# Altium PCB main.PcbDoc (part 3 of 3)
Units mm, origin at the board's own origin, x right, y up, seen from the top; angles counter-clockwise.
Board outline 74.1 x 99.1 mm, 4 copper layers (Top Layer, Ground Layer, Power Layer, Bottom Layer), stack 1.591 mm thick; 213 components, 167 nets, 923 pads, 289 vias.
Unrouted connection lines stored in the file: 41.
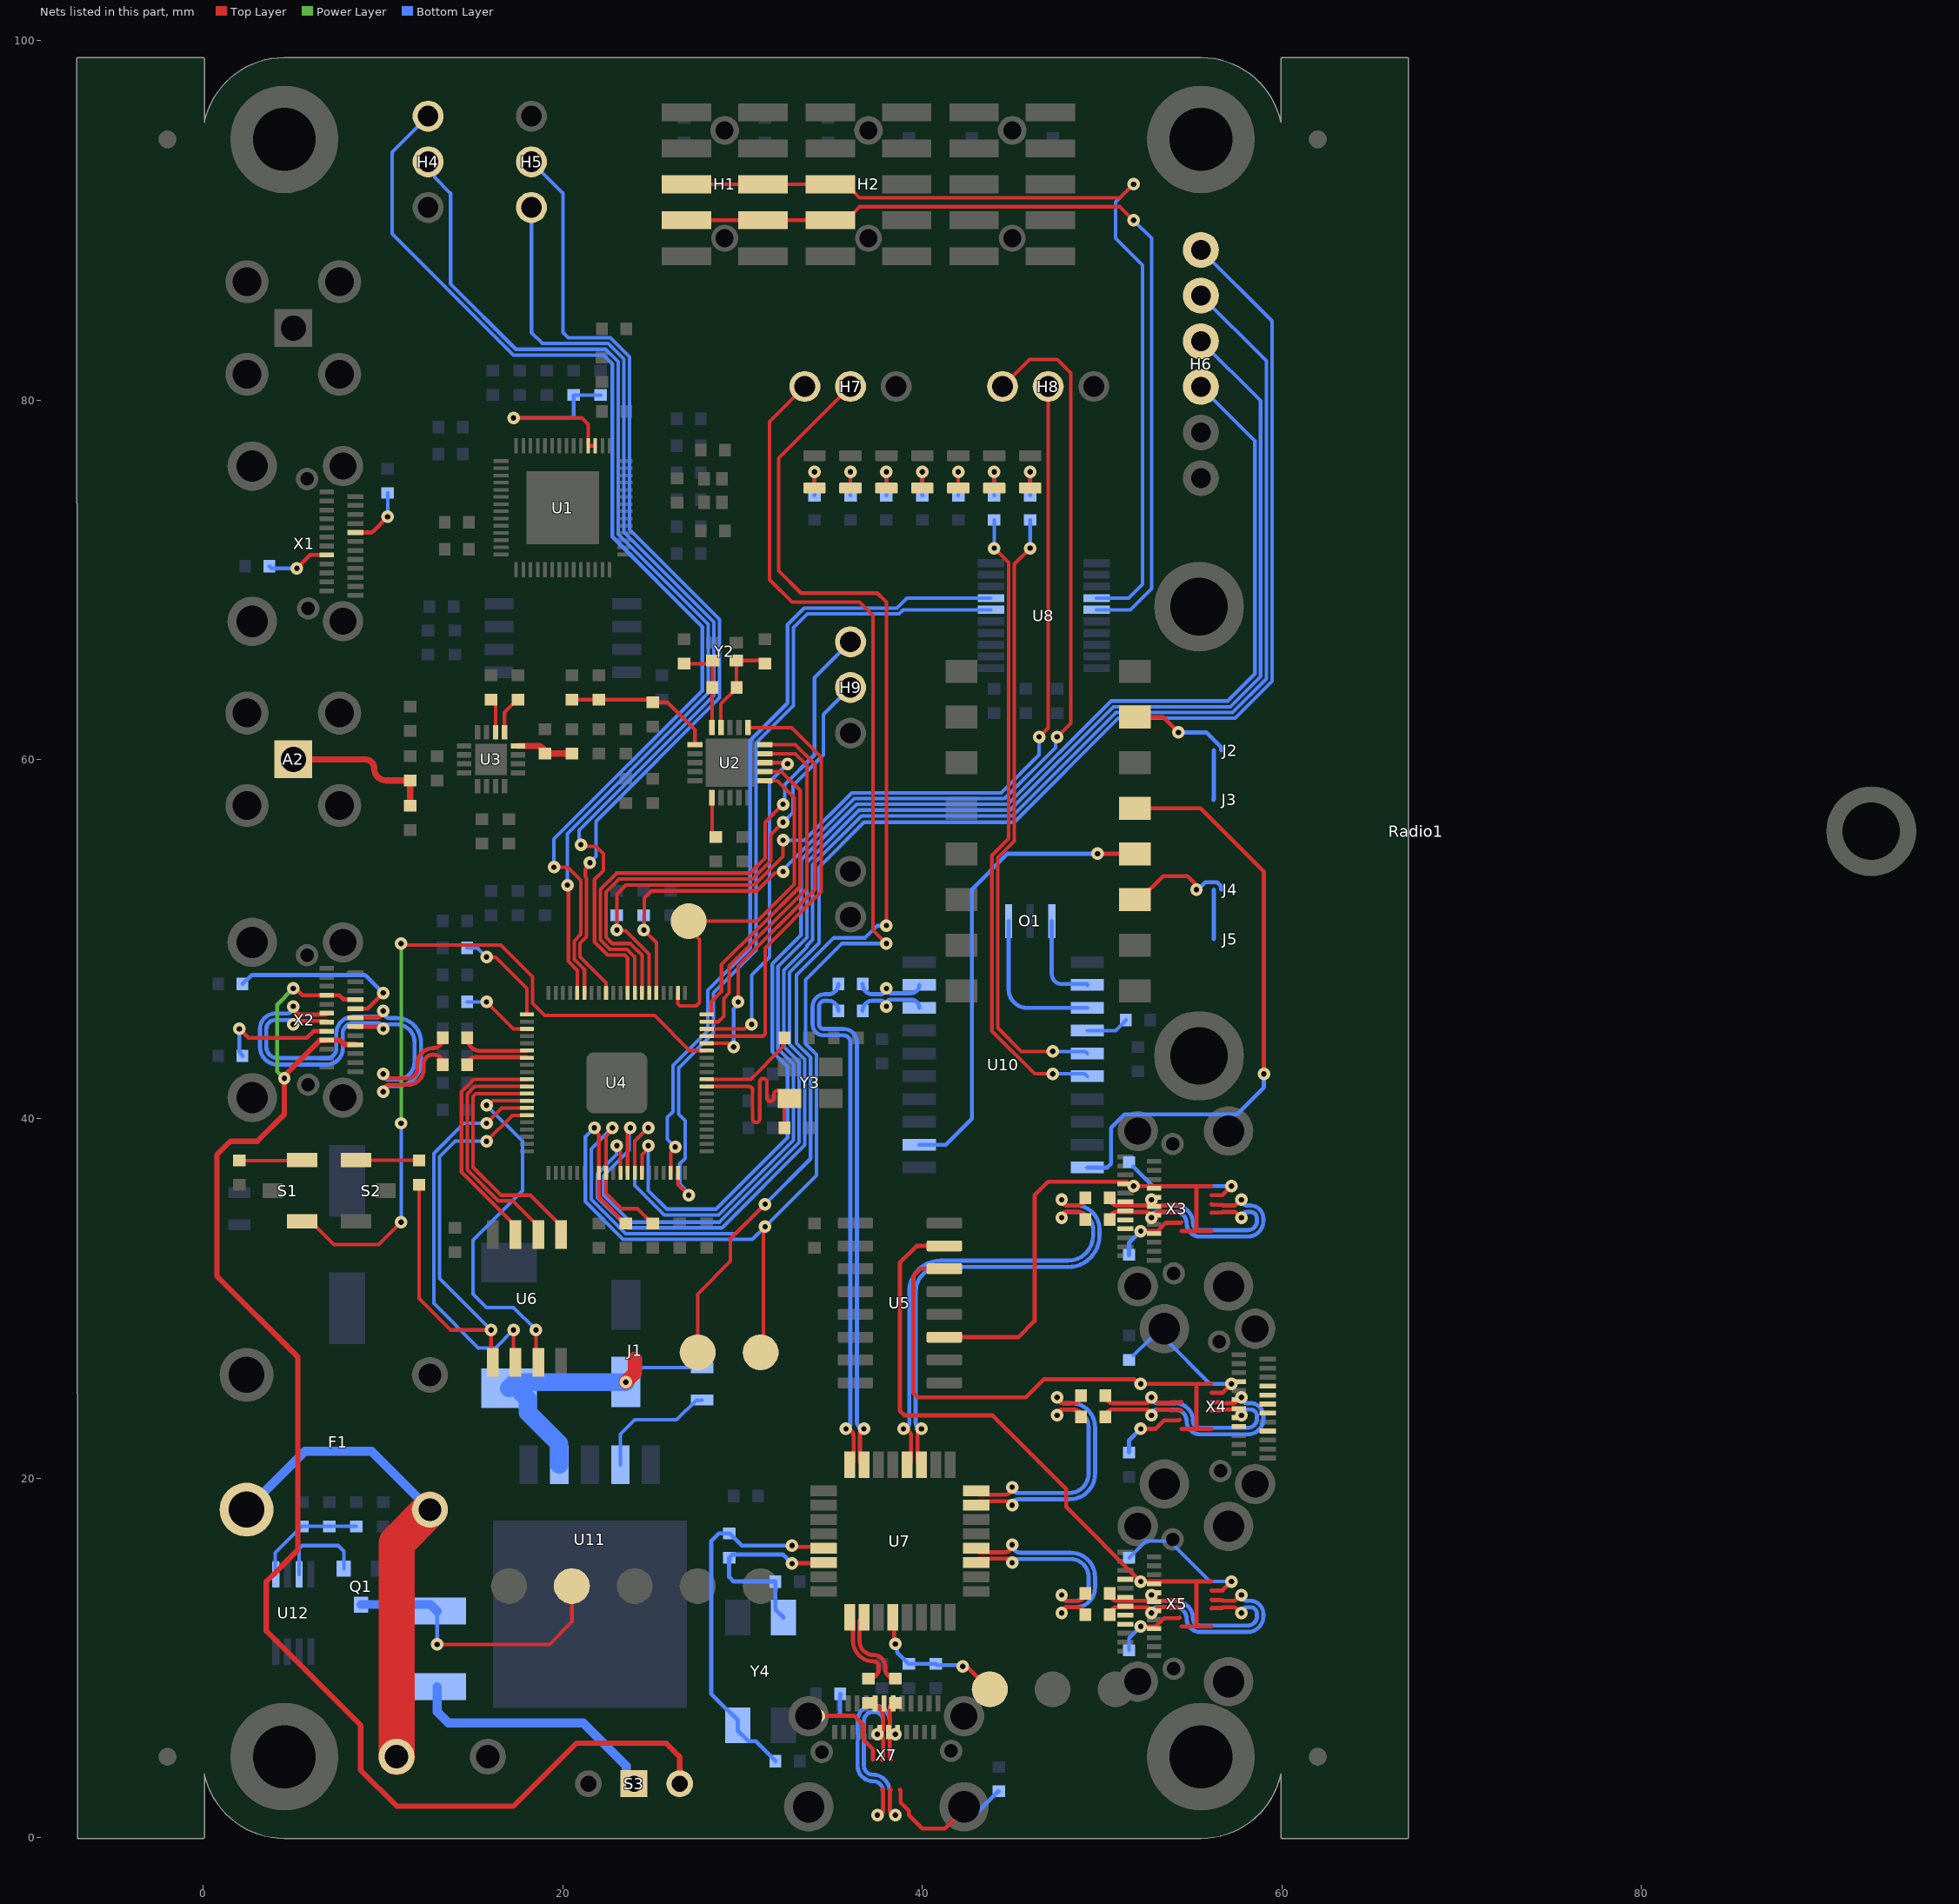
[diagram p5: the nets of this part, all layers, seen from the top]

## Via types
v1: diameter 0.7, hole 0.3, Top Layer to Bottom Layer, 289 vias

## Nets (pads, with @x,y where several pads share a name; then routed paths per layer and width w, separated by ;. In a path a pad name is that pad's centre, name@x,y a point inside that pad or via, vN(x,y) a via of type N, cw(c..) or ccw(c..) an arc to the next point about the centre after c; other vN are vias at no path point) (continued)
NetC65_1: C65.1 D8.1 J1.1 L9.2 U11.2 | length 17.9
  Top Layer w0.8: v1(23.5,25.35) 24,25.85 J1.1@24,26.65
  Bottom Layer w0.2: C65.1@23.5,25.45 24.2,26.15 L9.2@27.75,26.15
  Bottom Layer w1: D8.1@17,25 17.35,25.35 v1(23.5,25.35) ; D8.1@17.45,25 18.05,24.4 18.05,23.66 19.79,21.92 19.79,20.76 U11.2@19.8,20.75
NetD1_1: D1.1 R32.1 | length 2.2
  Top Layer w0.2: D1.1@34,75.1 v1(34,76)
  Bottom Layer w0.2: R32.1@34,74.675 v1(34,76)
NetD2_1: D2.1 R31.1 | length 2.2
  Top Layer w0.2: D2.1@36,75.1 v1(36,76)
  Bottom Layer w0.2: R31.1@36,74.675 v1(36,76)
NetD3_1: D3.1 R30.1 | length 2.2
  Top Layer w0.2: D3.1@38,75.1 v1(38,76)
  Bottom Layer w0.2: R30.1@38,74.675 v1(38,76)
NetD4_1: D4.1 R29.1 | length 2.2
  Top Layer w0.2: D4.1@40,75.1 v1(40,76)
  Bottom Layer w0.2: R29.1@40,74.675 v1(40,76)
NetD5_1: D5.1 R28.1 | length 2.2
  Top Layer w0.2: D5.1@42,75.1 v1(42,76)
  Bottom Layer w0.2: R28.1@42,74.675 v1(42,76)
NetD6_1: D6.1 R27.1 | length 2.2
  Top Layer w0.2: D6.1@44,75.1 v1(44,76)
  Bottom Layer w0.2: R27.1@44,74.675 v1(44,76)
NetD7_1: D7.1 R26.1 | length 2.2
  Top Layer w0.2: D7.1@46,75.1 v1(46,76)
  Bottom Layer w0.2: R26.1@46,74.675 v1(46,76)
NetF1_2: F1.2 X6.1 | length 27.4
  Top Layer w2: X6.1@10.75,4.5 10.75,16.4 F1.2@12.6,18.25
  Bottom Layer w0.5: F1.2@2.4,18.25 5.65,21.5 9.35,21.5 F1.2@12.6,18.25
NetF2_1: F2.1 S3.2 | length 14.3
  Bottom Layer w0.5: F2.1@13,8.4 13,7 13.625,6.375 21.125,6.375 23.519,3.981 23.519,3.441 S3.2@23.96,3
NetL9_1: L9.1 U11.4 | length 7
  Bottom Layer w0.2: U11.4@23.2,20.75 23.2,22.45 24,23.25 26.325,23.25 27.425,24.35 L9.1@27.75,24.35
NetR4_2: R4.2 U3.6 | length 1.9
  Top Layer w0.2: R4.2@16,63.325 16.025,63.325 16.25,63.1 U3.6@16.25,61.5
NetR5_2: R5.2 U3.5 | length 2.2
  Top Layer w0.2: U3.5@16.75,61.5 16.75,62.6 17.475,63.325 R5.2@17.5,63.325
NetR7_2: R7.2 U2.16 | length 2.3
  Top Layer w0.2: U2.16@28.295,57.868 28.295,55.88 R7.2@28.5,55.675
NetR11_1: R11.1 S1.2 | length 3.5
  Top Layer w0.2: R11.1@2,37.675 5.475,37.675 S1.2@5.5,37.7
NetR24_2: R24.2 X1.A5 | length 3.5
  Top Layer w0.23: X1.A5@8.465,72.625 9.295,72.625 ccw(c9.295,72.83) 9.44,72.686 v1(10.25,73.5)
  Bottom Layer w0.2: v1(10.25,73.5) R24.2@10.25,74.825
NetR33_1: R33.1 X1.B5 | length 3.6
  Top Layer w0.23: v1(5.2,70.625) 5.95,71.375 X1.B5@6.865,71.375
  Bottom Layer w0.23: R33.1@3.675,70.75 3.8,70.625 v1(5.2,70.625)
NetR38_2: R38.2 X2.A5 | length 10.3
  Top Layer w0.23: X2.A5@8.465,46.125 9.125,46.125 v1(10,47)
  Bottom Layer w0.23: R38.2@2.175,47.5 2.615,47.94 cw(c2.76,47.795) 2.76,48 8.915,48 cw(c8.915,47.795) 9.06,47.94 v1(10,47)
NetR41_1: R41.1 X2.B5 | length 6.8
  Top Layer w0.23: v1(2,45) 2.5,44.5 5.75,44.5 6.125,44.875 X2.B5@6.865,44.875
  Bottom Layer w0.23: v1(2,45) 2,43.735 R41.1@2.175,43.5
NetR42_1: R42.1 X5.B5 | length 7.2
  Top Layer w0.23: 56.085,35.75 56.7,35.75 v1(57.2,36.25)
  Bottom Layer w0.23: R42.1@51.735,37.34 52.825,36.25 v1(57.2,36.25)
NetR43_2: R43.2 X5.A5 | length 4.1
  Top Layer w0.23: v1(52.15,33.75) 53.08,33.75 53.545,34.215 54.38,34.215 54.415,34.25
  Bottom Layer w0.23: R43.2@51.5,32.425 51.5,33.1 v1(52.15,33.75)
NetR44_2: R44.2 X4.A5 | length 8.2
  Top Layer w0.23: 56.085,24.75 56.7,24.75 v1(57.2,25.25)
  Bottom Layer w0.2: R44.2@51.75,26.825 52.675,27.75 53.5,27.75 56,25.25 v1(57.2,25.25)
NetR45_1: R45.1 X4.B5 | length 4.1
  Top Layer w0.23: v1@52.05,22.75 52.98,22.75 53.445,23.215 54.28,23.215 54.315,23.25
  Bottom Layer w0.23: R45.1@51.5,21.425 51.5,22.1 v1(52.15,22.75)
NetR48_1: R48.1 X3.B5 | length 8.3
  Top Layer w0.23: 56.085,13.75 56.7,13.75 v1(57.2,14.25)
  Bottom Layer w0.2: R48.1@51.525,15.575 52.45,16.5 53.75,16.5 56,14.25 v1(57.2,14.25)
NetR50_2: R50.2 X3.A5 | length 4.1
  Top Layer w0.23: v1@52.05,11.75 52.98,11.75 53.445,12.215 54.28,12.215 54.315,12.25
  Bottom Layer w0.2: R50.2@51.5,10.425 51.5,11.1 v1(52.15,11.75)
NetR52_2: R52.2 X7.A5 | length 7.2
  Top Layer w0.23: v1(34.25,6.775) 36.225,6.775 36.738,6.262 36.738,5.437 37.25,4.924 37.25,4.335
  Bottom Layer w0.23: v1(34.25,6.775) 35.275,6.775 35.425,6.925 R52.2@35.425,8 R52.2@35.462,7.962
NetR53_1: R53.1 X7.B5 | length 7.8
  Top Layer w0.23: 38.75,2.665 38.785,2.63 38.785,1.965 39.25,1.5 39.25,1.25 40,0.5 41.25,0.5 v1(42,1.25)
  Bottom Layer w0.23: v1(42,1.25) 42.9,1.25 44.225,2.575 R53.1@44.25,2.575
"NRF CE": TP1.1 U2.1 U4.42 | length 20.3
  Top Layer w0.2: U4.42@26.4,47 26.4,46.4 26.511,46.289 27.42,46.289 27.593,46.462 27.593,49.989 27,50.582 TP1.1@27,51 30.826,51 32.88,53.054 32.88,57.87 31.932,58.818 U2.1@31.245,58.818
"NRF CS": U2.2 U4.40 | length 17.5
  Top Layer w0.2: U4.40@27.72,45.8 U4.40@28,45.8 28.253,45.8 28.263,45.81 28.263,46.512 28.82,47.07 28.82,48.57 30.93,50.68 30.959,50.68 33.2,52.921 33.2,58.272 32.154,59.318 U2.2@31.245,59.318
"NRF INT": U2.6 U4.37 | length 24.8
  Top Layer w0.2: U4.37@28,44.6 31.13,44.6 31.25,44.72 31.25,45.845 31.25,49.5 34.383,52.633 34.383,60.117 32.732,61.768 U2.6@30.295,61.768
"NRF MISO": U2.5 U4.36 | length 22.4
  Top Layer w0.2: U4.36@28,44.2 29.165,44.2 29.365,44 v1(29.5,44) ; v1(29.75,46.5) 29.75,48.5 34.023,52.773 34.023,59.727 32.932,60.818 U2.5@31.245,60.818
  Bottom Layer w0.2: v1(29.5,44) 29.5,46.115 29.75,46.365 v1(29.75,46.5)
"NRF MOSI": U2.4 U4.39 | length 19.6
  Top Layer w0.2: U4.39@28,45.4 28.65,45.4 28.95,45.7 28.95,46.7 29.25,47 29.25,48.5 33.57,52.82 33.57,59.68 32.932,60.318 U2.4@31.245,60.318
"NRF SCK": U2.3 U4.38 | length 19.2
  Top Layer w0.2: U4.38@28,45 30.115,45 30.365,45.25 v1(30.5,45.25) ; U2.3@31.245,59.818 32.432,59.818 v1(32.5,59.75)
  Bottom Layer w0.2: v1(30.5,45.25) 30.5,48 31.5,49 31.5,58.75 v1(32.5,59.75)
"NRF XTAL 1": C5.1 R6.1 U2.10 Y2.1 | length 5.4
  Top Layer w0.2: C5.1@26.75,65.325 28.175,65.325 Y2.1@28.35,65.5 28.325,65.475 R6.1@28.325,64 28.295,63.97 U2.10@28.295,61.768
"NRF XTAL 2": C6.1 R6.2 U2.9 Y2.2 | length 5.8
  Top Layer w0.2: U2.9@28.795,61.768 28.795,63.095 29.675,63.975 29.65,64 Y2.2@29.65,65.5 31.075,65.5 C6.1@31.25,65.325
"Op B (+) Input": C68.2 R46.2 R47.1 U12.5 | length 6.3
  Bottom Layer w0.2: U12.5@4.025,14.65 4,14.675 4,15.85 5.475,17.325 R47.1@5.5,17.325 R46.2@7,17.325 C68.2@8.5,17.325
"Op B Output": Q1.1 U12.7 | length 5.1
  Bottom Layer w0.2: U12.7@5.325,14.65 5.325,16.075 5.5,16.25 7.5,16.25 7.813,15.937 Q1.1@7.813,14.97
OSC1: O1.1 U10.2 | length 5.3
  Bottom Layer w0.23: O1.1@47.2,51 47.2,48.05 ccw(c47.75,48.05) 47.75,47.5 49.12,47.5 cw(c49.12,47.445) U10.2@49.175,47.445
OSC2: O1.3 U10.3 | length 8.8
  Bottom Layer w0.23: O1.3@44.8,51 44.8,47.2 ccw(c45.825,47.2) 45.825,46.175 U10.3@49.175,46.175
QSPI_SCLK: U4.71 U6.6 | length 13.4
  Top Layer w0.2: U4.71@18,41.8 15.097,41.8 14.68,41.383 14.68,37.163 16.413,35.43 17.23,35.43 18.635,34.025 U6.6@18.635,33.55
QSPI_SD0: U4.72 U6.5 | length 13.8
  Top Layer w0.2: U4.72@18,41.4 15.15,41.4 15,41.25 15,37.295 16.545,35.75 18.18,35.75 19.68,34.25 19.905,34.025 U6.5@19.905,33.55
QSPI_SD1: U4.74 U6.2 | length 22.3
  Top Layer w0.2: v1(15.75,39.75) 16.6,40.6 U4.74@18,40.6 ; v1(17.25,28.25) 17.25,26.565 U6.2@17.365,26.45
  Bottom Layer w0.2: v1(15.75,39.75) 14.5,39.75 12.82,38.07 12.82,29.727 15.297,27.25 16.25,27.25 v1(17.25,28.25)
QSPI_SD2: U4.73 U6.3 | length 21
  Top Layer w0.2: v1(15.75,40.75) 15.861,40.75 16.111,41 16.25,41 U4.73@18,41 ; v1(18.5,28.25) 18.5,26.585 U6.3@18.635,26.45
  Bottom Layer w0.2: v1(15.75,40.75) 17.75,38.75 17.75,36 15,33.25 15,30.25 15.75,29.5 17.25,29.5 v1(18.5,28.25)
QSPI_SD3: U4.70 U6.7 | length 13.1
  Top Layer w0.2: U6.7@17.365,33.55 17.365,34.025 17.14,34.25 14.36,37.03 14.36,41.515 15.045,42.2 U4.70@18,42.2
QSPI_SS: R12.2 U4.75 U6.1 | length 29.5
  Top Layer w0.2: R12.2@12,36.325 12,30 13.75,28.25 v1(16,28.25) 16,26.545 U6.1@16.095,26.45 ; v1(15.75,38.75) 17.19,40.19 17.99,40.19 U4.75@18,40.2
  Bottom Layer w0.2: v1(15.75,38.75) 14,38.75 13.14,37.89 13.14,31.11 v1(16,28.25)
"Radio CTS": J2.1 J3.1 Radio1.3 | length 8.4
  Top Layer w0.23: Radio1.3@51.825,62.35 53.4,62.35 v1(54.25,61.5)
  Bottom Layer w0.23: v1(54.25,61.5) 55.8,61.5 56.63,60.67 56.63,60.52 J2.1@56.65,60.5 ; 56.19,57.75 ccw(c56.19,57.78) 56.22,57.78 56.22,60.5
"Radio RTS": J4.1 J5.1 Radio1.11 | length 9
  Top Layer w0.23: Radio1.11@51.825,52.19 52.08,52.19 53.39,53.5 54.75,53.5 55.16,53.09 55.16,52.84 v1(55.25,52.75)
  Bottom Layer w0.23: v1(55.25,52.75) 55.342,52.75 55.752,53.16 56.39,53.16 56.63,52.92 56.63,52.77 J4.1@56.65,52.75 ; 56.22,50 56.22,52.75
"Radio RX": Radio1.7 U10.10 | length 33.5
  Top Layer w0.23: Radio1.7@51.825,57.27 55.48,57.27 59,53.75 v1(59,42.5)
  Bottom Layer w0.23: U10.10@49.175,37.285 50.285,37.285 50.5,37.5 50.5,39.5 51.25,40.25 57.5,40.25 59,41.75 v1(59,42.5)
"Radio TX": Radio1.9 U10.12 | length 26.2
  Top Layer w0.23: v1(49.75,54.75) 51.805,54.75 Radio1.9@51.825,54.73
  Bottom Layer w0.23: U10.12@39.825,38.555 41.305,38.555 42.75,40 42.75,52.75 44.75,54.75 v1(49.75,54.75)
Relay_EN: H9.1 U4.48 | length 31
  Top Layer w0.2: U4.48@24,47 24,49 23.57,49.43 22.617,49.43 22.08,49.967 22.08,52.754 22.996,53.67 30.42,53.67 31.25,54.5 31.25,56.5 v1(32.25,57.5)
  Bottom Layer w0.2: v1(32.25,57.5) 32.346,57.596 32.346,58.596 34,60.25 34,64.54 H9.1@36,66.54
Relay_FB: H9.2 U4.47 | length 28.4
  Top Layer w0.2: U4.47@24.4,47 24.4,49.1 23.75,49.75 22.75,49.75 22.4,50.1 22.4,52.621 23.129,53.35 30.553,53.35 31.57,54.367 31.57,55.82 v1(32.25,56.5)
  Bottom Layer w0.2: v1(32.25,56.5) 32.8,57.05 32.8,58.55 34.5,60.25 34.5,62.5 H9.2@36,64
"Right Motor Control 1": U4.18 U8.7 | length 45.5
  Top Layer w0.2: U4.18@26,37 26,38.115 26.25,38.365 v1(26.25,38.432)
  Bottom Layer w0.2: v1(26.25,38.432) 25.82,38.862 25.82,40.09 26.12,40.39 26.12,42.965 28.06,44.905 28.06,47.142 30.42,49.502 30.42,61.05 32.5,63.13 32.5,67.5 33.42,68.42 38.575,68.42 39.13,68.975 U8.7@43.812,68.975
"Right Motor Control 1 (5V)": H1.5 H1.6 H2.5 U8.14 | length 51.7
  Top Layer w0.2: H1.5@26.875,92 H1.6@31.125,92 H2.5@34.875,92 35.75,92 36.5,91.25 51,91.25 v1(51.75,92)
  Bottom Layer w0.2: U8.14@49.688,68.975 51.475,68.975 52.25,69.75 52.25,87.5 50.75,89 50.75,91 v1(51.75,92)
"Right Motor Control 2": U4.19 U8.6 | length 47.6
  Top Layer w0.2: U4.19@26.4,37 26.4,36.35 v1(27,35.75)
  Bottom Layer w0.2: v1(27,35.75) 27,35.861 26.5,36.361 26.5,37.5 26.8,37.8 26.8,39.897 26.44,40.257 26.44,42.832 28.38,44.772 28.38,47.01 30.74,49.37 30.74,60.917 32.82,62.997 32.82,67.32 33.6,68.1 38.708,68.1 38.933,68.325 U8.6@43.812,68.325
"Right Motor Control 2 (5V)": H1.7 H1.8 H2.7 U8.15 | length 50
  Top Layer w0.2: H1.7@26.875,90 H1.8@31.125,90 H2.7@34.875,90 35.75,90 36.5,90.75 51,90.75 v1(51.75,90)
  Bottom Layer w0.2: U8.15@49.688,68.325 51.575,68.325 52.75,69.5 52.75,89 v1(51.75,90)
RP2350-USB-5V-VIN: S3.1 X2.A4 X2.A9 X2.B4 X2.B9 | length 81.8
  Top Layer w0.23: v1(5,47.25) 5.127,47.25 5.502,46.875 X2.B9@6.865,46.875 7.56,46.875 7.79,46.645 8.445,46.645 X2.A4@8.465,46.625
  Top Layer w0.3: X2.A9@8.465,44.125 8.45,44.14 7.83,44.14 7.595,44.375 X2.B4@6.865,44.375 6.85,44.36 6.461,44.36 4.577,42.475 4.577,42.327 v1(4.5,42.25) 4.5,40.25 3,38.75 1.5,38.75 0.75,38 0.75,31.25 5.25,26.75 5.25,16 3.5,14.25 3.5,11.5 8.75,6.25 8.75,3.75 10.75,1.75 17.25,1.75 20.75,5.25 25.75,5.25 26.5,4.5 S3.1@26.5,3
  Power Layer w0.23: v1(4.5,42.25) 4.101,42.649 4.101,46.351 v1(5,47.25)
RP2350_D_N: R8.1 X2.A7 X2.B7 | length 27.5
  Top Layer w0.23: v1(5,46.25) ccw(c5.446,46.25) 5.446,45.804 6.794,45.804 ccw(c6.794,45.875) X2.B7@6.865,45.875 ; X2.A7@8.465,45.125 9.875,45.125 cw(c9.875,45) v1(10,45) ; v1(10,42.5) ccw(c10.25,42.5) 10.25,42.25 11.393,42.25 ccw(c11.393,42.75) 11.893,42.75 11.893,43.046 cw(c12.775,43.046) 12.775,43.929 ccw(c12.775,44.479) 13.325,44.479 R8.1@13.325,44.5
  Bottom Layer w0.23: v1(5,46.25) cw(c4.607,46.25) 4.607,45.857 4,45.857 ccw(c4,45) 3.143,45 3.143,44 ccw(c4.125,44) 4.125,43.018 6.865,43.018 ccw(c6.865,43.903) 7.75,43.903 7.75,44.75 cw(c8.321,44.75) 8.321,45.321 9.679,45.321 cw(c9.679,45) v1(10,45) cw(c10.25,45) 10.25,45.25 10.75,45.25 cw(c10.75,44.25) 11.75,44.25 11.75,43.179 cw(c10.75,43.179) 10.75,42.179 10.321,42.179 cw(c10.321,42.5) v1(10,42.5)
RP2350_D_P: R10.1 X2.A6 X2.B6 | length 27.6
  Top Layer w0.23: v1(5,45.25) cw(c5.196,45.25) 5.196,45.446 6.794,45.446 cw(c6.794,45.375) X2.B6@6.865,45.375 ; X2.A6@8.465,45.625 9.625,45.625 ccw(c9.625,46) v1(10,46) ; v1(10,41.5) cw(c10.393,41.5) 10.393,41.893 11.393,41.893 ccw(c11.393,42.75) 12.25,42.75 12.25,43.046 cw(c12.775,43.046) 12.775,43.571 cw(c12.775,43.021) 13.325,43.021 R10.1@13.325,43
  Bottom Layer w0.23: v1(5,45.25) ccw(c4.75,45.25) 4.75,45.5 4,45.5 ccw(c4,45) 3.5,45 3.5,44 ccw(c4.125,44) 4.125,43.375 6.865,43.375 ccw(c6.865,43.903) 7.393,43.903 7.393,44.75 cw(c8.321,44.75) 8.321,45.679 9.679,45.679 ccw(c9.679,46) v1(10,46) ccw(c10.393,46) 10.393,45.607 10.75,45.607 cw(c10.75,44.25) 12.107,44.25 12.107,43.179 cw(c10.75,43.179) 10.75,41.821 10.321,41.821 ccw(c10.321,41.5) v1(10,41.5)
RP2350_DX_N: R8.2 U4.66 | length 3.7
  Top Layer w0.23: R8.2@14.675,44.5 ccw(c15.396,44.5) 15.396,43.779 17.979,43.779 ccw(c17.979,43.8) U4.66@18,43.8
RP2350_DX_P: R10.2 U4.67 | length 3.6
  Top Layer w0.23: R10.2@14.675,43 cw(c15.096,43) 15.096,43.421 17.979,43.421 cw(c17.979,43.4) U4.67@18,43.4
RUN: S1.1 U4.35 | length 42.4
  Top Layer w0.2: S1.1@5.5,34.3 5.95,34.3 7.25,33 9.75,33 v1(11,34.25) ; v1(11,49.75) 11.075,49.675 16.55,49.675 18.32,47.905 18.32,46.43 19,45.75 25.1,45.75 27.05,43.8 U4.35@28,43.8
  Power Layer w0.2: v1(11,39.75) v1(11,49.75)
  Bottom Layer w0.2: v1(11,34.25) v1(11,39.75)
RXLED: R27.2 U10.6 | length 35.5
  Top Layer w0.2: v1(44,71.75) 44.8,70.95 44.8,55.585 43.87,54.655 43.87,44.88 46.25,42.5 v1(47.25,42.5)
  Bottom Layer w0.2: v1(44,71.75) R27.2@44,73.325 ; v1(47.25,42.5) 49.04,42.5 U10.6@49.175,42.365
SCL0: H8.2 R35.1 U4.46 | length 55.3
  Top Layer w0.2: U4.46@24.8,47 24.8,49.153 23.482,50.471 23.029,50.471 v1(23,50.5) 23,52.5 23.5,53 30.655,53 32.25,54.595 v1(32.25,55.5) ; v1(46.5,61.25) 47,61.75 H8.2@47,80.75
  Bottom Layer w0.2: v1(23,50.5) R35.1@23,51.325 ; v1(32.25,55.5) 33.44,55.5 36.08,58.14 44.39,58.14 46.5,60.25 v1(46.5,61.25)
SCL1: H7.2 R14.1 TP2.1 U4.9 | length 89.4
  Top Layer w0.2: v1(22.75,39.5) 22.75,39.365 22.4,39.015 U4.9@22.4,37 22.4,35.85 23.25,35 24.15,35 24.975,34.175 R14.1@25,34.175 ; TP2.1@27.5,27 27.5,30.25 29.327,32.077 29.327,33.327 v1(31.25,35.25) ; H7.2@36,80.75 32,76.75 32,70.5 33.25,69.25 37.5,69.25 38,68.75 v1(38,50.75)
  Bottom Layer w0.2: v1(22.75,39.5) 21.57,38.32 21.57,35.525 23.485,33.61 29.61,33.61 v1(31.25,35.25) 33.78,37.78 33.78,43.431 33,44.211 33,48 35.07,50.07 36.82,50.07 37.495,50.745 37.995,50.745 v1(38,50.75)
SDA0: H8.1 R34.1 U4.45 | length 58.7
  Top Layer w0.2: U4.45@25.2,47 25.2,49.8 v1(24.5,50.5) 24.53,50.53 24.53,52.28 24.93,52.68 30.788,52.68 31.798,53.691 32.191,53.691 v1(32.25,53.75) ; H8.1@44.46,80.75 45.96,82.25 47.5,82.25 48.25,81.5 48.25,62 v1(47.5,61.25)
  Bottom Layer w0.2: v1(24.5,50.5) R34.1@24.5,51.325 ; v1(32.25,53.75) 32.25,53.858 36.212,57.82 44.57,57.82 47.404,60.654 47.404,61.154 v1(47.5,61.25)
SDA1: H7.1 R13.1 TP3.1 U4.8 | length 85.8
  Top Layer w0.2: v1(21.75,39.5) 21.75,39.365 22,39.115 U4.8@22,37 22,35.65 23.475,34.175 R13.1@23.5,34.175 ; TP3.1@31,27 31.154,27.154 31.154,33.904 v1(31.25,34) ; H7.1@33.46,80.75 31.5,78.79 31.5,70 32.75,68.75 36.5,68.75 37.25,68 37.25,50.5 v1(38,49.75)
  Bottom Layer w0.2: v1(21.75,39.5) 21.25,39 21.25,35.392 23.352,33.29 30.54,33.29 v1(31.25,34) 34.1,36.85 34.1,43.563 33.5,44.163 33.5,47.737 35.513,49.75 v1(38,49.75)
"Servo 1 PWM": H6.1 U4.11 | length 90.7
  Top Layer w0.2: v1(23,38.5) 23,38.365 23.2,38.165 U4.11@23.2,37
  Bottom Layer w0.2: v1(23,38.5) 22.985,38.485 22.985,38.004 21.93,36.949 21.93,35.617 23.612,33.936 23.617,33.93 28.845,33.93 33.46,38.545 33.46,43.298 32.61,44.148 32.61,48.135 34.25,49.775 34.25,54 36.75,56.5 45.108,56.5 50.898,62.29 57.398,62.29 59.46,64.352 59.46,84.39 H6.1@55.5,88.35
"Servo 2 PWM": H6.2 U4.12 | length 89.1
  Top Layer w0.2: U4.12@23.6,37 23.6,39.215 23.75,39.365 v1(23.75,39.5)
  Bottom Layer w0.2: v1(23.75,39.5) 23.68,39.43 23.68,38.247 22.25,36.817 22.25,35.75 23.75,34.25 28.713,34.25 33.14,38.677 33.14,43.166 32.29,44.016 32.29,48.267 33.57,49.547 33.57,49.63 33.89,49.95 33.89,54.14 36.61,56.86 45.015,56.86 50.765,62.61 57.265,62.61 59.14,64.485 59.14,82.17 H6.2@55.5,85.81
"Servo 3 PWM": H6.3 U4.13 | length 83.6
  Top Layer w0.2: U4.13@24,37 24,38.75 v1(24.75,39.5)
  Bottom Layer w0.2: v1(24.75,39.5) 24,38.75 24,36.297 25.642,34.655 28.665,34.655 32.82,38.81 32.82,43.033 31.97,43.883 31.97,48.482 33.57,50.082 33.57,54.273 36.477,57.18 44.883,57.18 50.633,62.93 57.133,62.93 58.82,64.617 58.82,79.95 H6.3@55.5,83.27
"Servo 4 PWM": H6.4 U4.14 | length 77.2
  Top Layer w0.2: U4.14@24.4,37 24.4,38.015 24.75,38.365 v1(24.75,38.5)
  Bottom Layer w0.2: v1(24.75,38.5) 24.75,36 25.775,34.975 28.533,34.975 32.5,38.942 32.5,42.9 31.65,43.75 31.65,48.615 33.25,50.215 33.25,54.405 36.345,57.5 44.75,57.5 50.5,63.25 57,63.25 58.5,64.75 58.5,77.73 H6.4@55.5,80.73
"SMA Antenna": A2.1 C15.2 L5.2 | length 8.6
  Top Layer w0.35: A2.1@5,60 9,60 cw(c9,59.5) 9.5,59.5 ccw(c10.175,59.5) 10.175,58.825 L5.2@11.5,58.825 C15.2@11.5,57.425
TXLED: R26.2 U10.5 | length 34.6
  Top Layer w0.2: v1(46,71.75) 45.12,70.87 45.12,55.452 44.19,54.522 44.19,45.06 45.5,43.75 v1(47.25,43.75)
  Bottom Layer w0.2: v1(46,71.75) R26.2@46,73.325 ; v1(47.25,43.75) 49.06,43.75 U10.5@49.175,43.635
TXRX: C10.1 C11.1 U3.4 | length 3.2
  Top Layer w0.35: U3.4@17.5,60.75 18.575,60.75 cw(c18.575,60.325) C10.1@19,60.325 C11.1@20.5,60.325
U\S\B\_\B\O\O\T\: R12.1 S2.1 | length 3.5
  Top Layer w0.2: S2.1@8.5,37.7 11.975,37.7 R12.1@12,37.675
"UART0 RX": H4.2 U4.56 | length 59.1
  Top Layer w0.2: v1(20.25,53) 20.31,52.94 20.31,48.744 20.8,48.254 U4.56@20.8,47
  Bottom Layer w0.2: H4.2@12.5,93.25 12.792,92.958 12.792,92.546 12.868,92.469 12.868,92.382 13.75,91.5 13.75,86.453 17.383,82.82 22.383,82.82 23.07,82.133 23.07,72.525 28.08,67.515 28.08,63.688 20.25,55.858 v1(20.25,53)
"UART0 TX": H4.3 U4.55 | length 64.6
  Top Layer w0.2: v1(19.5,54) 20.271,54 21,53.271 21,50.263 20.63,49.893 20.63,48.876 21.2,48.306 U4.55@21.2,47
  Bottom Layer w0.2: H4.3@12.5,95.79 10.5,93.79 10.5,89.25 17.25,82.5 22.25,82.5 22.75,82 22.75,72.392 27.76,67.382 27.76,63.82 19.5,55.56 v1(19.5,54)
"UART1 RX": H5.2 U4.52 | length 55.8
  Top Layer w0.2: v1(21.5,54.25) 21.5,54.139 21.25,53.889 21.25,53.474 21.32,53.404 21.32,50.13 20.95,49.76 20.95,49.022 22.4,47.572 U4.52@22.4,47
  Bottom Layer w0.2: H5.2@18.25,93.25 20,91.5 20,83.75 20.29,83.46 22.648,83.46 23.71,82.398 23.71,72.79 28.72,67.78 28.72,63.423 21.846,56.548 21.846,54.611 21.5,54.266 v1(21.5,54.25)
"UART1 TX": H5.3 U4.49 | length 55.7
  Top Layer w0.2: v1(21,55.25) 21.096,55.154 21.846,55.154 22.25,54.75 22.25,53.813 21.76,53.323 21.76,49.835 22.485,49.11 23.437,49.11 23.6,48.947 U4.49@23.6,47
  Bottom Layer w0.2: H5.3@18.25,90.71 18.25,83.75 18.86,83.14 22.515,83.14 23.39,82.265 23.39,72.657 28.4,67.647 28.4,63.555 20.904,56.059 20.904,55.346 v1(21,55.25)
USB0_D_N: R22.1 X7.A7 X7.B7 | length 15.3
  Top Layer w0.23: v1(37.5,1.25) ccw(c37.5,1.571) 37.821,1.571 37.821,2.594 ccw(c37.75,2.594) 37.75,2.665 ; 38.25,4.335 cw(c38.25,4.406) 38.179,4.406 38.179,5.429 cw(c38.5,5.429) v1(38.5,5.75) cw(c38.5,6.071) 38.179,6.071 38.179,7.179 cw(c38.5,7.179) R22.1@38.5,7.5
  Bottom Layer w0.23: v1(37.5,1.25) ccw(c37.5,1.571) 37.821,1.571 37.821,2.571 ccw(c37.25,2.571) 37.25,3.143 cw(c37.25,4) 36.393,4 36.393,5.25 cw(c36.75,5.25) 36.394,5.272 36.414,5.6 ccw(c35.6,5.65) 36.402,5.795 cw(c36.98,5.899) 36.393,5.899 36.393,6.5 cw(c37.25,6.5) 37.25,7.357 37.321,7.357 cw(c37.321,6.5) 38.179,6.5 38.179,6.071 ccw(c38.5,6.071) v1(38.5,5.75)
USB0_D_P: R21.1 X7.A6 X7.B6 | length 14.5
  Top Layer w0.23: R21.1@37,7.5 cw(c37,6.679) 37.821,6.679 37.821,6.071 cw(c37.5,6.071) v1(37.5,5.75) cw(c37.5,5.429) 37.821,5.429 37.821,4.406 cw(c37.75,4.406) 37.75,4.335 ; 38.25,2.665 ccw(c38.25,2.594) 38.179,2.594 38.179,1.571 ccw(c38.5,1.571) v1(38.5,1.25)
  Bottom Layer w0.23: v1(37.5,5.75) ccw(c37.5,6.071) 37.821,6.071 37.821,6.5 ccw(c37.321,6.5) 37.321,7 37.25,7 ccw(c37.25,6.5) 36.75,6.5 36.75,5.899 ccw(c36.98,5.899) 36.754,5.859 cw(c35.6,5.65) 36.77,5.578 36.75,5.25 36.75,4 ccw(c37.25,4) 37.25,3.5 cw(c37.25,2.571) 38.179,2.571 38.179,1.571 ccw(c38.5,1.571) v1(38.5,1.25)
USB0_DX_N: R22.2 U7.2 | length 4.7
  Top Layer w0.23: U7.2@36.75,12.262 ccw(c36.75,12.012) 36.5,12.012 36.5,10.957 ccw(c37.3,10.957) 37.3,10.157 cw(c37.3,9.529) 37.929,9.529 37.929,9.4 ccw(c38.479,9.4) 38.479,8.85 R22.2@38.5,8.85
USB0_DX_P: R21.2 U7.1 | length 4.7
  Top Layer w0.23: U7.1@35.95,12.262 cw(c35.95,12.069) 36.143,12.069 36.143,10.957 ccw(c37.3,10.957) 37.3,9.8 cw(c37.3,9.529) 37.571,9.529 37.571,9.4 cw(c37.021,9.4) 37.021,8.85 R21.2@37,8.85
USB1_D_N: R19.1 X3.A7 X3.B7 | length 14.9
  Top Layer w0.23: R19.1@50.425,13.6 ccw(c50.846,13.6) 50.846,13.178 52.429,13.178 ccw(c52.429,13.5) v1(52.75,13.5) 52.798,13.5 53.12,13.178 53.78,13.178 53.816,13.215 54.38,13.215 54.415,13.25 ; 56.085,12.75 56.12,12.784 56.684,12.784 56.72,12.821 57.38,12.821 57.702,12.5 v1(57.75,12.5)
  Bottom Layer w0.23: v1(52.75,13.5) ccw(c53.071,13.5) 53.071,13.178 54.064,13.178 cw(c54.064,12.183) 55.06,12.183 ccw(c55.441,12.183) 55.441,11.802 58.108,11.802 ccw(c58.108,12.31) 58.616,12.31 58.616,12.455 ccw(c58.25,12.455) 58.25,12.821 58.071,12.821 ccw(c58.071,12.5) v1(57.75,12.5)
USB1_D_P: R20.1 X3.A6 X3.B6 | length 16.1
  Top Layer w0.23: R20.1@50.425,12.4 cw(c50.846,12.4) 50.846,12.821 52.429,12.821 cw(c52.429,12.5) v1(52.75,12.5) 52.798,12.5 53.12,12.821 53.78,12.821 53.816,12.784 54.38,12.784 54.415,12.75 ; 56.085,13.25 56.12,13.215 56.684,13.215 56.72,13.178 57.38,13.178 57.702,13.5 v1(57.75,13.5)
  Bottom Layer w0.23: v1(52.75,12.5) cw(c53.071,12.5) 53.071,12.821 54.064,12.821 cw(c54.064,12.183) 54.703,12.183 ccw(c55.441,12.183) 55.441,11.445 58.108,11.445 ccw(c58.108,12.31) 58.973,12.31 58.973,12.455 ccw(c58.25,12.455) 58.25,13.178 58.071,13.178 cw(c58.071,13.5) v1(57.75,13.5)
USB1_DX_N: R19.2 U7.11 | length 11.6
  Top Layer w0.23: U7.11@42.988,15.3 cw(c43.209,15.3) 43.209,15.521 44.779,15.521 cw(c44.779,15.3) v1(45,15.3) ; v1(47.75,13.5) ccw(c48.071,13.5) 48.071,13.178 48.654,13.178 ccw(c48.654,13.6) R19.2@49.075,13.6
  Bottom Layer w0.23: v1(45,15.3) cw(c45.2,15.3) 45.2,15.5 48.25,15.5 cw(c48.25,14.5) 49.25,14.5 49.25,13.903 cw(c48.525,13.903) 48.525,13.178 48.071,13.178 cw(c48.071,13.5) v1(47.75,13.5)
USB1_DX_P: R20.2 U7.12 | length 13
  Top Layer w0.23: U7.12@42.988,16.1 ccw(c43.209,16.1) 43.209,15.879 44.579,15.879 ccw(c44.579,16.3) v1(45,16.3) ; v1(47.75,12.5) cw(c48.071,12.5) 48.071,12.821 48.654,12.821 cw(c48.654,12.4) R20.2@49.075,12.4
  Bottom Layer w0.23: v1(45,16.3) ccw(c45.443,16.3) 45.443,15.857 48.25,15.857 cw(c48.25,14.5) 49.607,14.5 49.607,13.903 cw(c48.525,13.903) 48.525,12.821 48.071,12.821 ccw(c48.071,12.5) v1(47.75,12.5)
USB1_VOUT: U5.15 X3.A4 X3.A9 X3.B4 X3.B9 | length 26.8
  Top Layer w0.23: 41.225,27.845 45.345,27.845 46.25,28.75 46.25,35.75 47,36.5 51.373,36.5 51.623,36.25 v1(51.75,36.25) 54.415,36.25 55.25,36.25 ; 54.415,33.75 55.25,33.75 ; 56.085,33.75 55.25,33.75 ; 56.085,36.25 55.25,36.25 ; 55.25,33.75 55.25,36.25
USB2_D_N: R17.1 X4.A7 X4.B7 | length 15.1
  Top Layer w0.23: R17.1@50.175,24.6 ccw(c50.596,24.6) 50.596,24.179 52.429,24.179 ccw(c52.429,24.5) v1(52.75,24.5) ; v1@52.798,24.5 53.12,24.179 53.78,24.179 53.816,24.215 54.38,24.215 54.415,24.25 ; 56.085,23.75 56.12,23.785 56.684,23.785 56.72,23.821 57.38,23.821 57.702,23.5 v1(57.75,23.5)
  Bottom Layer w0.23: v1(52.75,24.5) ccw(c53.071,24.5) 53.071,24.179 54.064,24.179 cw(c54.064,23.183) 55.06,23.183 ccw(c55.441,23.183) 55.441,22.802 58.108,22.802 ccw(c58.108,23.31) 58.616,23.31 58.616,23.455 ccw(c58.25,23.455) 58.25,23.821 58.071,23.821 ccw(c58.071,23.5) v1(57.75,23.5)
USB2_D_P: R18.1 X4.A6 X4.B6 | length 16.3
  Top Layer w0.23: R18.1@50.175,23.4 cw(c50.596,23.4) 50.596,23.821 52.429,23.821 cw(c52.429,23.5) v1(52.75,23.5) ; v1@52.798,23.5 53.12,23.821 53.78,23.821 53.816,23.785 54.38,23.785 54.415,23.75 ; 56.085,24.25 56.12,24.215 56.684,24.215 56.72,24.179 57.38,24.179 57.702,24.5 v1(57.75,24.5)
  Bottom Layer w0.23: v1(52.75,23.5) cw(c53.071,23.5) 53.071,23.821 54.064,23.821 cw(c54.064,23.183) 54.703,23.183 ccw(c55.441,23.183) 55.441,22.445 58.129,22.445 ccw(c58.129,23.289) 58.973,23.289 58.973,23.455 ccw(c58.25,23.455) 58.25,24.179 58.071,24.179 cw(c58.071,24.5) v1(57.75,24.5)
USB2_DX_N: R17.2 U7.15 | length 15.3
  Top Layer w0.23: U7.15@42.988,18.5 cw(c43.209,18.5) 43.209,18.721 44.779,18.721 cw(c44.779,18.5) v1(45,18.5) ; v1(47.5,24.5) ccw(c47.821,24.5) 47.821,24.179 48.404,24.179 ccw(c48.404,24.6) R17.2@48.825,24.6
  Bottom Layer w0.23: v1(45,18.5) cw(c45.321,18.5) 45.321,18.821 48.179,18.821 ccw(c48.179,20.25) 49.607,20.25 49.607,22.846 ccw(c48.275,22.846) 48.275,24.179 47.821,24.179 cw(c47.821,24.5) v1(47.5,24.5)
USB2_DX_P: R18.2 U7.16 | length 14.3
  Top Layer w0.23: U7.16@42.988,19.3 ccw(c43.209,19.3) 43.209,19.079 44.579,19.079 ccw(c44.579,19.5) v1(45,19.5) ; v1(47.5,23.5) cw(c47.821,23.5) 47.821,23.821 48.404,23.821 cw(c48.404,23.4) R18.2@48.825,23.4
  Bottom Layer w0.23: v1(45,19.5) ccw(c45.321,19.5) 45.321,19.179 48.179,19.179 ccw(c48.179,20.25) 49.25,20.25 49.25,22.846 ccw(c48.275,22.846) 48.275,23.821 47.821,23.821 ccw(c47.821,23.5) v1(47.5,23.5)
USB2_VOUT: U5.14 X4.A4 X4.A9 X4.B4 X4.B9 | length 29.8
  Top Layer w0.23: U5.14@41.225,31.655 39.905,31.655 39.5,31.25 39.5,24.75 39.75,24.5 45.75,24.5 46.75,25.5 51.795,25.5 52.045,25.25 54.415,25.25 55.25,25.25 ; 54.415,22.75 55.25,22.75 ; 56.085,22.75 55.25,22.75 ; 56.085,25.25 55.25,25.25 ; 55.25,22.75 55.25,25.25
  other v1: 52.15,25.25
USB3_D_N: R15.1 X5.A7 X5.B7 | length 14.9
  Top Layer w0.23: R15.1@50.425,35.6 ccw(c50.846,35.6) 50.846,35.179 52.429,35.179 ccw(c52.429,35.5) v1(52.75,35.5) 52.798,35.5 53.12,35.179 53.78,35.179 53.816,35.215 54.38,35.215 54.415,35.25 ; 56.085,34.75 56.12,34.785 56.684,34.785 56.72,34.821 57.38,34.821 57.702,34.5 v1(57.75,34.5)
  Bottom Layer w0.23: v1(52.75,35.5) ccw(c53.071,35.5) 53.071,35.179 54.064,35.179 cw(c54.064,34.183) 55.06,34.183 ccw(c55.441,34.183) 55.441,33.802 58.108,33.802 ccw(c58.108,34.31) 58.616,34.31 58.616,34.455 ccw(c58.25,34.455) 58.25,34.821 58.071,34.821 ccw(c58.071,34.5) v1(57.75,34.5)
USB3_D_P: R16.1 X5.A6 X5.B6 | length 16.1
  Top Layer w0.23: R16.1@50.425,34.4 cw(c50.846,34.4) 50.846,34.821 52.429,34.821 cw(c52.429,34.5) v1(52.75,34.5) 52.798,34.5 53.12,34.821 53.78,34.821 53.816,34.785 54.38,34.785 54.415,34.75 ; 56.085,35.25 56.12,35.215 56.684,35.215 56.72,35.179 57.38,35.179 57.702,35.5 v1(57.75,35.5)
  Bottom Layer w0.23: v1(52.75,34.5) cw(c53.071,34.5) 53.071,34.821 54.064,34.821 cw(c54.064,34.183) 54.703,34.183 ccw(c55.441,34.183) 55.441,33.445 58.108,33.445 ccw(c58.108,34.31) 58.973,34.31 58.973,34.455 ccw(c58.25,34.455) 58.25,35.179 58.071,35.179 cw(c58.071,35.5) v1(57.75,35.5)
USB3_DX_N: R15.2 U7.19 | length 27.2
  Top Layer w0.23: U7.19@39.95,20.738 cw(c39.95,20.959) 39.729,20.959 39.729,22.529 cw(c39.95,22.529) v1(39.95,22.75) ; v1(47.75,35.5) ccw(c48.071,35.5) 48.071,35.179 48.654,35.179 ccw(c48.654,35.6) R15.2@49.075,35.6
  Bottom Layer w0.23: v1(39.95,22.75) cw(c39.95,23.071) 39.629,23.071 39.629,30.379 cw(c41,30.379) 41,31.75 48.107,31.75 ccw(c48.107,33.5) 49.857,33.5 49.857,33.846 ccw(c48.525,33.846) 48.525,35.179 48.071,35.179 cw(c48.071,35.5) v1(47.75,35.5)
USB3_DX_P: R16.2 U7.20 | length 26.8
  Top Layer w0.23: v1(38.95,22.75) cw(c38.95,22.329) 39.371,22.329 39.371,20.959 cw(c39.15,20.959) U7.20@39.15,20.738 ; v1(47.75,34.5) cw(c48.071,34.5) 48.071,34.821 48.654,34.821 cw(c48.654,34.4) R16.2@49.075,34.4
  Bottom Layer w0.23: v1(38.95,22.75) ccw(c38.95,23.071) 39.271,23.071 39.271,30.379 cw(c41,30.379) 41,32.107 48.107,32.107 ccw(c48.107,33.5) 49.5,33.5 49.5,33.846 ccw(c48.525,33.846) 48.525,34.821 48.071,34.821 ccw(c48.071,34.5) v1(47.75,34.5)
USB3_VOUT: U5.11 X5.A4 X5.A9 X5.B4 X5.B9 | length 37.1
  Top Layer w0.23: 41.225,32.925 39.675,32.925 38.75,32 38.75,23.75 39,23.5 43.9,23.5 48,19.4 48,18.4 v1(52.15,14.25) 54.415,14.25 55.25,14.25 ; 54.415,11.75 55.25,11.75 ; 56.085,11.75 55.25,11.75 ; 56.085,14.25 55.25,14.25 ; 55.25,11.75 55.25,14.25
USB4_D_N: R39.1 U10.18 | length 4.2
  Bottom Layer w0.23: R39.1@36.675,46 36.675,46.021 cw(c37.225,46.021) 37.225,46.571 37.679,46.571 cw(c37.679,46.25) v1(38,46.25) 38,46.381 cw(c38.25,46.381) 38.25,46.631 39.369,46.631 cw(c39.369,46.175) U10.18@39.825,46.175
USB4_D_P: R37.1 U10.19 | length 4.1
  Bottom Layer w0.23: R37.1@36.675,47.5 36.675,47.479 ccw(c37.225,47.479) 37.225,46.929 37.679,46.929 ccw(c37.679,47.25) v1(38,47.25) 38,47.239 ccw(c38.25,47.239) 38.25,46.989 39.369,46.989 ccw(c39.369,47.445) U10.19@39.825,47.445
USB4_DX_N: R39.2 U7.23 | length 29.3
  Top Layer w0.23: U7.23@36.75,20.738 cw(c36.75,20.959) 36.529,20.959 36.529,22.529 cw(c36.75,22.529) v1(36.75,22.75)
  Bottom Layer w0.23: R39.2@35.325,46 ccw(c34.754,46) 34.754,46.571 34.571,46.571 ccw(c34.571,46.25) 34.25,46.25 34.25,45.25 ccw(c34.5,45.25) 34.5,45 35.607,45 cw(c35.607,44.25) 36.357,44.25 36.357,23.143 ccw(c36.75,23.143) v1(36.75,22.75)
USB4_DX_P: R37.2 U7.24 | length 29.8
  Top Layer w0.23: v1(35.75,22.75) cw(c35.75,22.329) 36.171,22.329 36.171,20.959 cw(c35.95,20.959) U7.24@35.95,20.738
  Bottom Layer w0.23: R37.2@35.325,47.5 cw(c34.754,47.5) 34.754,46.929 34.571,46.929 ccw(c34.571,46.25) 33.893,46.25 33.893,45.25 ccw(c34.5,45.25) 34.5,44.643 35.607,44.643 cw(c35.607,44.25) 36,44.25 36,23 cw(c35.75,23) v1(35.75,22.75)
"USB XTAL 1": C69.1 R49.1 U7.30 Y4.1 | length 11.5
  Top Layer w0.23: v1(32.75,15.25) 32.775,15.275 34.487,15.275 U7.30@34.512,15.3
  Bottom Layer w0.23: Y4.1@32.27,12.25 31.825,12.695 C69.1@31.825,14.25 29.5,14.25 29.25,14.5 R49.1@29.25,15.575 29.425,15.75 32.25,15.75 v1(32.75,15.25)
"USB XTAL 2": C72.1 R49.2 U7.29 Y4.3 | length 20.7
  Top Layer w0.23: v1(32.75,16.25) 32.825,16.175 34.437,16.175 U7.29@34.512,16.1
  Bottom Layer w0.23: R49.2@29.25,16.925 28.675,16.925 28.25,16.5 28.25,8.005 29.12,7.135 29.145,7.135 29.73,6.55 29.73,5.95 30.315,5.365 30.735,5.365 31.825,4.275 C72.1@31.825,4.25 ; R49.2@29.275,16.925 29.95,16.25 v1(32.75,16.25)
USB-Reset: C71.2 R51.2 TP9.1 U7.4 | length 8.1
  Top Layer w0.23: U7.4@38.35,12.262 38.425,12.187 38.425,10.85 v1(38.5,10.775) ; v1(42.25,9.525) 42.34,9.435 42.565,9.435 TP9.1@43.75,8.25
  Bottom Layer w0.23: v1(38.5,10.775) 38.59,10.685 38.59,10.31 39.225,9.675 C71.2@39.25,9.675 R51.2@40.75,9.675 40.825,9.6 42.175,9.6 v1(42.25,9.525)
USB-UART_RESET: R40.1 U10.4 | length 2.4
  Bottom Layer w0.2: U10.4@49.175,44.905 50.755,44.905 51.325,45.475 R40.1@51.325,45.5
USB-VIN: F2.2 Q1.3 TP5.1 | length 16.3
  Top Layer w0.2: v1(13,10.75) 19.25,10.75 20.5,12 TP5.1@20.5,14
  Bottom Layer w0.2: v1(13,10.75) F2.2@13,12.6
  Bottom Layer w0.5: Q1.3@8.763,12.97 12.63,12.97 F2.2@13,12.6
VDD3P3-A: C32.2 L6.2 U1.3 U1.4 | length 12
  Top Layer w0.2: v1(17.25,79) 21.05,79 21.4,78.65 U1.4@21.4,77.45 U1.3@21.8,77.45
  Bottom Layer w0.2: v1(17.25,79) 20.489,79 20.6,79.111 L6.2@20.6,80.275 C32.2@22.1,80.275
VDD_PA: C7.2 C8.2 L2.2 U2.11 | length 8.4
  Top Layer w0.2: C7.2@20.5,63.325 C8.2@22,63.325 24.85,63.325 L2.2@25,63.175 25.825,63.175 27.345,61.655 U2.11@27.345,60.818
VREG_AVDD: R36.1 U4.61 | length 5.7
  Top Layer w0.2: v1(15.75,49) 15.755,48.995 16.255,48.995 18,47.25 U4.61@18,45.8
  Bottom Layer w0.2: R36.1@14.675,49.5 15.25,49.5 v1(15.75,49)
VREG_LX: L7.2 U4.63 | length 3.9
  Top Layer w0.2: v1(15.75,46.5) 17.25,45 U4.63@18,45
  Bottom Layer w0.2: L7.2@14.675,46.5 v1(15.75,46.5)
XIN: C20.2 U4.30 Y3.1 | length 12.1
  Top Layer w0.2: U4.30@28,41.8 28.25,41.8 30.35,41.8 cw(c30.35,41.6) 30.55,41.6 30.55,40 ccw(c30.75,40) 30.95,40 30.95,42.047 cw(c31.15,42.047) 31.35,42.047 31.35,41.172 ccw(c31.55,41.172) 31.75,41.172 31.75,41.367 cw(c31.95,41.367) 32.091,41.509 32.475,41.125 Y3.1@32.6,41.125 32.537,41.063 32.325,40.851 C20.2@32.325,39.5
XOUT: R9.1 U4.31 | length 5.5
  Top Layer w0.2: U4.31@28,42.2 30.45,42.2 32.231,43.981 32.231,44.406 R9.1@32.325,44.5
pads on no net: Fid1. Fid2. Fid3. Fid4. Fid5. Fid6. Fid7. Fid8. H1.X H2.X H3.X Radio1.5 Radio1.6 Radio1.8 Radio1.10 Radio1.12 Radio1.13 Radio1.14 Radio1.15 Radio1.X@92.795,56 U1.5 U1.6 U1.7 U1.8 U1.9 U1.10 U1.11 U1.12 U1.13 U1.14 U1.15 U1.16 U1.17 U1.18 U1.19 U1.21 U1.22 U1.23 U1.28 U1.29 U1.37 U1.38 U1.39 U1.40 U1.41 U1.42 U1.43 U1.44 U1.46 U1.47 U1.48 U1.49 U1.50 U1.55 U3.1 U3.7 U3.12 U3.13 U3.15 U4.20 U4.28 U4.33 U4.34 U4.43 U4.44 U4.53 U4.54 U4.57 U4.58 U4.59 U4.77 U4.78 U4.79 U4.80 U5.8 U5.9 U5.10 U7.5 U7.21 U7.22 U7.32 U8.1 U8.4 U8.5 U8.16 U8.17 U8.20 U10.7 U10.8 U10.9 U10.14 U10.15 U10.16 U12.1 U12.2 U12.3 X1.A2 X1.A3 X1.A8 X1.A10 X1.A11 X1.B2 X1.B3 X1.B8 X1.B10 X1.B11 X2.A2 X2.A3 X2.A8 X2.A10 X2.A11 X2.B2 X2.B3 X2.B8 X2.B10 X2.B11 X3.A2 X3.A3 X3.A8 X3.A10 X3.A11 X3.B2 X3.B3 X3.B8 X3.B10 X3.B11 X4.A2 X4.A3 X4.A8 X4.A10 X4.A11 X4.B2 X4.B3 X4.B8 X4.B10 X4.B11 X5.A2 X5.A3 X5.A8 X5.A10 X5.A11 X5.B2 X5.B3 X5.B8 X5.B10 X5.B11 X7.A2 X7.A3 X7.A4 X7.A8 X7.A9 X7.A10 X7.A11 X7.B2 X7.B3 X7.B4 X7.B8 X7.B9 X7.B10 X7.B11 Y2.3 Y2.4

## Polygon pours and split planes (outlines as drawn)
+3V3 on Power Layer "+3V3 Poly" (solid, remove dead copper, shelved, pour order 10): 8,8 52,8 52,99 8,99
+5V on Power Layer "+5V Poly" (solid, remove dead copper, shelved, pour order 9): 21,18 16.5,18 16.5,34 38.5,34 38.5,87.25 24.75,87.25 24.75,99 52,99 52,24.5 21,24.5
Earth on Power Layer "Earth" (solid, remove dead copper, shelved, pour order 3): 52,99 60,99 60,0 0,0 0,99 8,99 8,8 52,8
GND on Ground Layer "GND Plane" (solid, remove dead copper, shelved, pour order 2): 0,99 60,99 60,0 0,0
GND on Bottom Layer "Bottom GND Poly" (hatched 45Degree grid 0.508 track 0.203, remove dead copper, shelved, pour order 7): 0,99 0,0 60,0 60,99
GND on Top Layer "Top GND Poly" (hatched 45Degree grid 0.508 track 0.203, remove dead copper, shelved, pour order 8): 0,99 0,0 60,0 60,99

## Keep-outs
Keep-Out Layer:
  lines w0.1: 0,4.5 ccw(c4.5,4.5) 4.5,0 55.5,0 ccw(c55.5,4.5) 60,4.5 ; 0,4.5 0,94.5 ; 0,4.5 0,0 -7,0 -7,99 0,99 0,94.5 ; 0,94.5 cw(c4.5,94.5) 4.5,99 55.5,99 cw(c55.5,94.5) 60,94.5 ; 60,4.5 60,94.5 ; 60,4.5 60,0 67,0 67,99 60,99 60,94.5

## Other copper
Top Layer:
  pour cut-out: 0,64.25 14.75,64.25 14.75,55.75 0,55.75
  pour cut-out: 0,88.25 24.075,88.25 24.075,77.25 0,77.25

## Silkscreen, mask and mechanical layers (free items; w line width, h text height)
Top Overlay:
  drawing of 15 lines, arcs and shapes, not listed
  text "1" at 58.75,87.85 h1
  text "UART0" at 9.502,86.665 h1
  text "UART1" at 16.844,86.665 h1
  text "2" at 58.75,85.31 h1
  text "3" at 58.75,82.77 h1
  text "I2C1" at 27.249,81.01 h1
  text "4" at 58.75,80.23 h1
  text "ESP32" at 1,78.5 h1
  text "I2C0" at 48.251,76.71 h1
  text "Servo" at 53.167,71.605 h1
  text "RX" at 44.5,69.084 h1 r90
  text "TX" at 46.5,69.084 h1 r90
  text "TOP SIDE" at 62.75,55.123 h1.5 r270
  text "nRF24L01P" at 1,54.5 h1
  text "RP2350B" at 1,51.75 h1
  text "nRF" at 22.417,51.75 h1
  text "CE" at 28.917,50.5 h1
  text "TOP SIDE" at -2.75,43.877 h1.5 r90
  text "Pi Control / Board" at 38.352,38.971 h1.5
  text "V1" at 44.667,36.125 h1.25
  text "RUN" at 3.617,32.35 h1
  text "BOOT" at 7.217,32.35 h1
  text "EN" at 24.5,23.084 h1 r90
  text "SCL" at 28,22.084 h1 r90
  text "SDA" at 31.5,22.084 h1 r90
  text "+5V" at 17.5,16.25 h1 r90
  text "USB VIN" at 21,16.25 h1 r90
  text "+3V3" at 24.5,16.25 h1 r90
  text "GND" at 28,16.25 h1 r90
  text "EARTH" at 31.5,16.25 h1 r90
  text "+5V" at 9.417,9.65 h1
  text "GND" at 14.497,9.65 h1
  text "ESP32" at 21.92,5.25 h1 r90
  text "RP2350" at 27,5.25 h1 r90
  text "Pi" at 31.667,3 h1
  text "\EN1" at 47.75,2.918 h1 r90
  text "\OC1" at 51.25,2.918 h1 r90
  text "RESET" at 44.25,1.585 h1 r90
Bottom Overlay:
  region: 35.25,32.71 35.25,33.295 35.886,33.295 35.886,32.659 35.25,32.659 35.25,32.709
  region: 37.858,30.114 38.432,30.114 38.432,29.477 37.795,29.477 37.795,30.114 37.857,30.114
  region: 39.658,29.477 39.068,29.477 39.068,30.114 39.705,30.114 39.705,29.477 39.659,29.477
  region: 35.886,30.985 35.886,31.386 36.523,31.386 36.523,32.023 35.886,32.023 35.886,32.659 37.159,32.659 37.159,31.386 37.795,31.386 37.795,32.659 37.159,32.659 37.159,33.932 37.795,33.932 37.795,33.295 39.705,33.295 39.705,33.932 40.341,33.932 40.341,32.659 39.705,32.659 39.705,31.386 40.341,31.386 40.341,32.659 41.614,32.659 41.614,32.023 40.977,32.023 40.977,31.386 41.614,31.386 41.614,30.75 42.25,30.75 42.25,29.477 41.614,29.477 41.614,30.114 40.977,30.114 40.977,30.75 40.341,30.75 40.341,30.114 39.705,30.114 39.705,30.75 37.795,30.75 37.795,30.114 37.159,30.114 37.159,30.75 36.523,30.75 36.523,30.114 35.886,30.114 35.886,29.477 35.25,29.477 35.25,30.75 35.886,30.75 35.886,30.984
  region: 42.25,32.819 42.25,32.659 41.614,32.659 41.614,33.295 42.25,33.295 42.25,32.821
  lines w0.1: 0,0 0,99 ; 60,0 60,99
  lines w0.254: 39.75,83.758 40.258,83.25 ; 40.258,84.258 39.75,83.75 47,83.75 47,91 47.508,90.492 ; 46.5,90.492 47.008,91 ; 49.8,5.5 51.5,5.5 50.992,6.008 ; 50.992,5 51.5,5.508
  text "TX" at 10.5,95.29 h1
  text "GND" at 22.668,95.29 h1
  text "RX" at 10.5,92.75 h1
  text "RX" at 21.666,92.75 h1
  text "GND" at 10.498,90.21 h1
  text "TX" at 21.666,90.21 h1
  text "UART0" at 14.073,88.25 h1
  text "UART1" at 21.176,88.25 h1
  text "Board" at 46.25,86.3 h1.2
  text "Dim" at 46.25,84.5 h1.2
  text "99mm" at 47.75,84.076 h1.2 r270
  text "60mm" at 45.574,82.05 h1.2
  text "Relay" at 38.999,68.083 h1
  text "EN" at 39.416,66.04 h1
  text "FB" at 39.416,63.5 h1
  text "GND" at 40.416,60.96 h1
  text "BOTTOM SIDE" at -2.75,57.372 h1.5 r90
  text "Buzzer" at 39.499,55 h1
  text "EN" at 39.416,53.27 h1
  text "GND" at 34.25,50.73 h1
  text "BOTTOM SIDE" at 62.75,41.628 h1.5 r270
  text "Designed by / Russell MacGregor" at 47.124,24.517 h1
  text "M3.5" at 49.25,4.9 h1.2
  text "+" at 9.25,4 h1
  text "-" at 17.916,4 h1
  text "+5V VIN" at 16.299,1.5 h1
Poly Pour Planning:
  lines w0.2: 52,24.5 21,24.5 21,18 16.5,18 16.5,34 38.5,34 38.5,87.25 24.75,87.25 24.75,99 52,99 ; 0,0 -7,0 -7,99 0,99 ; 0,0 60,0 ; 0,0 0,99 ; 0,99 8,99 8,8 52,8 52,99 ; 52,99 60,99 ; 60,0 67,0 67,99 60,99 ; 60,0 60,99
  text "Earth" at 52.751,97.5 h1
  text "3V3" at 11.667,96 h1
  text "5V" at 39.417,72.25 h1

## Text inside footprints (layer, text, board x,y; h text height)
C64: Bottom Overlay "+" at 10.75,28 h1.5 r270
C65: Bottom Overlay "+" at 24.95,24.1 h1.5 r270
X6: Top Overlay "2-Pin Screw / Term" at 8.718,6.345 h0.75; Top Overlay "[Front]" at 8.868,1.458 h0.75